# Altium PCB PCB2_third.PCBDOC (part 2 of 3)
Units mil, origin at the board's own origin, x right, y up, seen from the top; angles counter-clockwise.
Board outline 6000 x 4000 mil, 2 copper layers (Top Layer, Bottom Layer); 72 components, 143 nets, 481 pads, 207 vias.
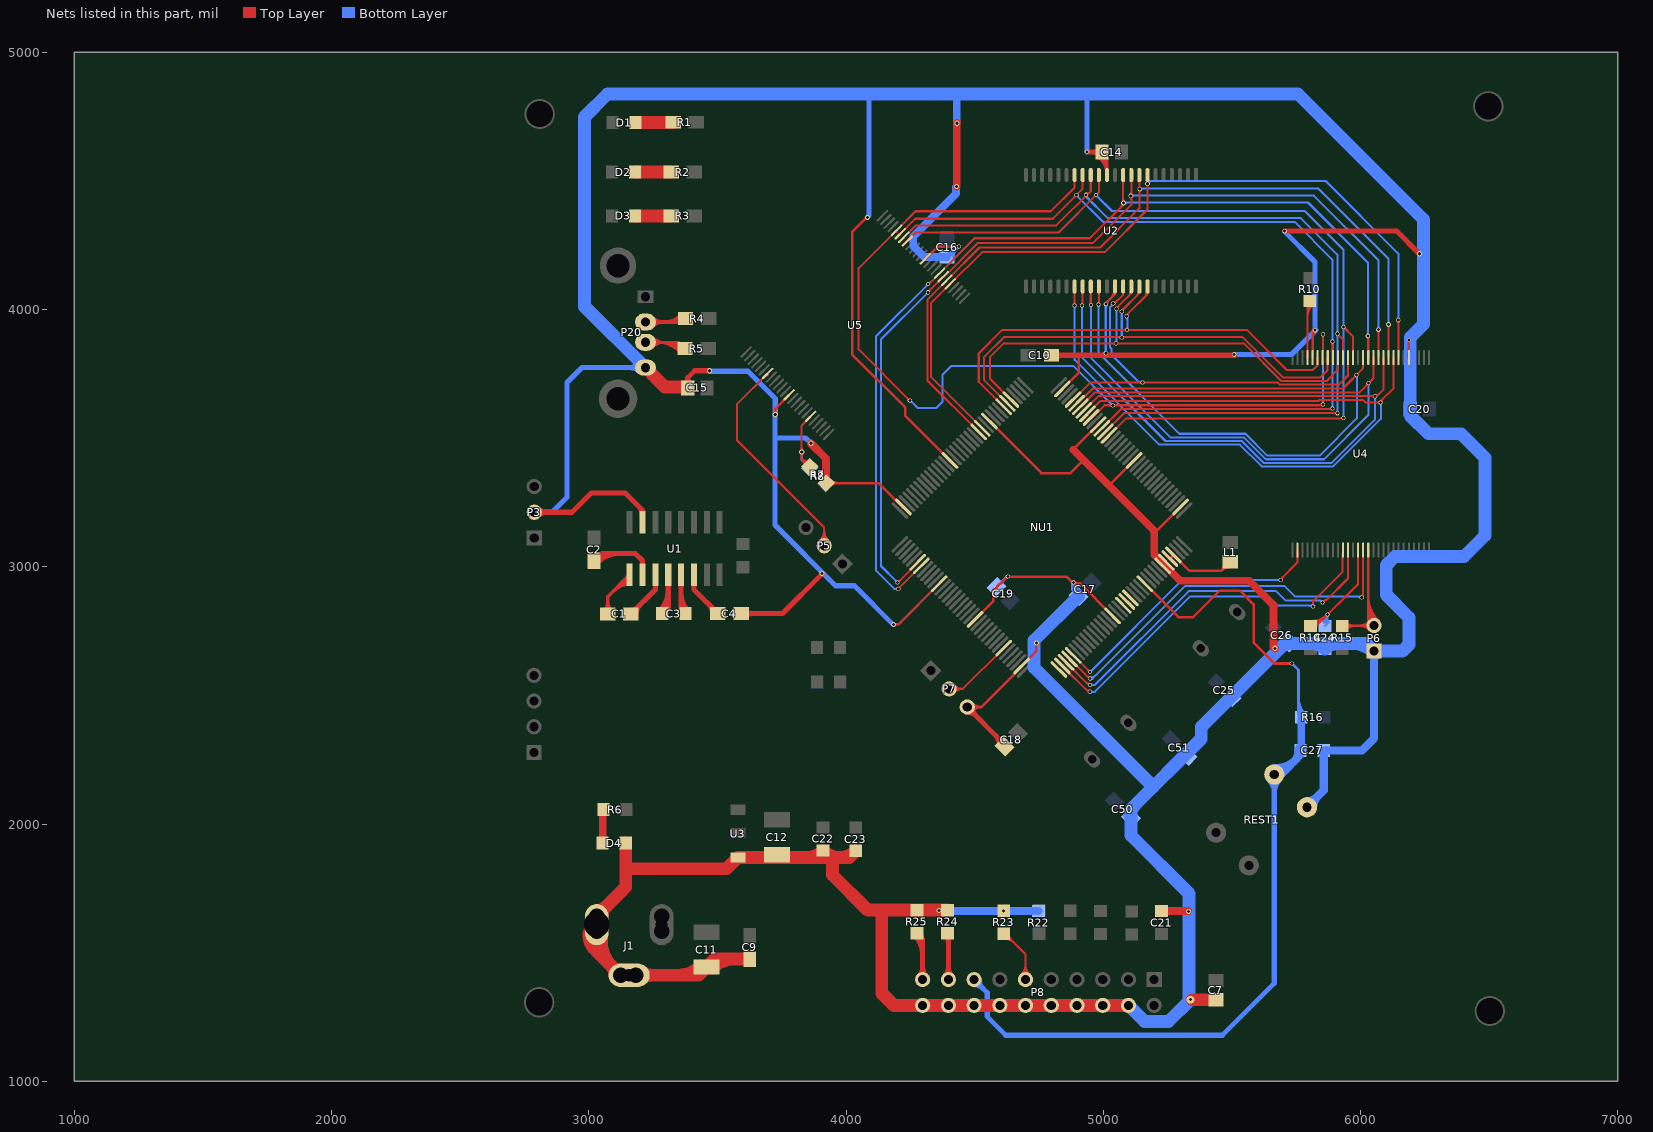
[diagram p2: the nets of this part, all layers, seen from the top]

## Via types
v1: diameter 16, hole 12, Top Layer to Bottom Layer, 141 vias
v2: diameter 18, hole 12, Top Layer to Bottom Layer, 34 vias
v3: diameter 20, hole 12, Top Layer to Bottom Layer, 29 vias
v4: diameter 30, hole 12, Top Layer to Bottom Layer, 2 vias
v5: diameter 30, hole 14, Top Layer to Bottom Layer, 1 vias

## Nets (pads, with @x,y where several pads share a name; then routed paths per layer and width w, separated by ;. In a path a pad name is that pad's centre, name@x,y a point inside that pad or via, vN(x,y) a via of type N, cw(c..) or ccw(c..) an arc to the next point about the centre after c; other vN are vias at no path point) (continued)
A19: NU1.2 U4.11 | length 1509
  Top Layer w8: NU1.2@4841.34,2614.32 4941.66,2514 v1(4948,2514) ; 4930.35,2525.31 ccw(c4948,2542.97) v1@4948,2518 ; v1@5812.17,2848.83 ccw(c5802.93,2858.07) 5816,2858.07 ; v1@5816,2846 5816,2866 5931,2981 U4.11@5931,3051
  Bottom Layer w8: v1(4948,2514) 4967,2514 5337,2884 5630,2884 5665,2849 5821,2849 v1(5815,2846) ; v1@4950.83,2511.17 cw(c4957.66,2504.34) 4957.66,2514 cw(c4957.66,2523.66) v1@4950.83,2516.83 ; 5798.1,2849 cw(c5798.1,2829.1) v1@5812.17,2843.17
A20: NU1.3 U4.12 | length 1507.9
  Top Layer w8: NU1.3@4855.26,2628.24 4942.5,2541 v1(4949,2541) ; 4931.07,2552.43 ccw(c4949,2570.35) v1@4949,2545 ; v1@5853,2865 ccw(c5853,2874.66) 5859.83,2867.83 ccw(c5866.66,2861) v1@5857,2861 ; v1@5854,2862 5862,2870 5867,2870 5951.53,2954.53 U4.12@5951.53,3065
  Bottom Layer w8: v1(4949,2541) 4968,2541 5332,2905 5672,2905 5707,2870 ; v1@4951.83,2538.17 cw(c4958.66,2531.34) 4958.66,2541 cw(c4958.66,2550.66) v1@4951.83,2543.83 ; 5708,2869 5844,2869 v1@5853,2860 ; 5844.5,2868.5 ccw(c5852.95,2876.95) v1@5852.99,2865
  other v1: 5853,2861
A21: NU1.4 U4.15 | length 1622.8
  Top Layer w8: NU1.4@4869.18,2642.16 v1@4945.34,2566 ; 4935.92,2575.42 ccw(c4949,2588.5) v1@4949,2570 ; v1@6002.17,2883.83 ccw(c5981.85,2904.15) 6010.59,2904.15 ; v1@6008,2881 6010.59,2883.59 U4.15@6010.59,3065
  Bottom Layer w8: v1@4949,2562 ccw(c4949,2576.49) 4959.24,2566.24 ; v1(4949,2566) 4959,2566 5319,2926 5704,2926 5746,2884 ; v1@4949,2570 ccw(c4949,2603.8) 4972.9,2579.9 ; v1@4951.83,2563.17 cw(c4958.66,2556.34) 4958.66,2566 cw(c4958.66,2575.66) v1@4951.83,2568.83 ; 5745,2884 6000,2884 v1@6004,2880 ; 5988.1,2884 cw(c5988.1,2864.1) v1@6002.17,2878.17
  other v1: 6005,2881
A22: NU1.5 U4.2 | length 1184.9
  Top Layer w8: NU1.5@4883.1,2656.08 v1@4951,2588.18 ; 4940.76,2598.41 ccw(c4949,2606.65) v1@4949,2595 ; 4942.75,2596.42 cw(c4937.33,2591) v1@4945,2591 ; v1@5690,2952 5754.69,3016.68 U4.2@5754.69,3065 ; v1@5694,2949 cw(c5710.9,2949) 5698.95,2960.95
  Bottom Layer w8: v1(4949,2591) 5307,2949 v1(5690,2949) v1@5691,2949 ; v1@4949,2595 ccw(c4949,2604.66) 4955.83,2597.83 ccw(c4962.66,2591) v1@4953,2591 ; v1@5687.17,2946.17 ccw(c5680.34,2939.34) 5680.34,2949 ccw(c5680.34,2958.66) v1@5687.17,2951.83
A23: NU1.1
BOOT0: NU1.138 P7.2 | length 409
  Top Layer w8: P7.2@4400.71,2525.29 4454.44,2525.29 ; P7.2@4414.3,2514.22 cw(c4437.6,2495.24) 4437.6,2525.29 cw(c4437.6,2555.34) P7.2@4414.3,2536.36 ; P7.2@4420.5,2509.17 cw(c4454.43,2481.52) 4454.43,2525.29 ; P7.2@4420.5,2541.41 ccw(c4454.43,2569.06) 4454.43,2525.29 ; NU1.138@4613.06,2683.92 4454.44,2525.29
D0: NU1.85 U2.7 U4.35 U5.29 | length 3303.7
  Top Layer w8: NU1.85@4529.55,3538.57 4330,3738.11 4330,4024.06 U5.29@4405.41,4099.47 4528.94,4223 5006,4223 5172.02,4389.02 U2.7@5172.02,4523 ; v2@5168.46,4485.46 cw(c5159.87,4476.87) 5172.02,4476.87 ; v2@5168.46,4492.54 ccw(c5159.87,4501.13) U2.7@5172.02,4501.13 ; U2.7@5169.28,4500.58 cw(c5162.67,4493.96) 5172.02,4493.96 cw(c5181.38,4493.96) U2.7@5174.76,4500.58 ; 5172.02,4476.99 cw(c5184.01,4476.99) v2@5175.54,4485.46 ; U2.7@5172.02,4501.01 ccw(c5184.01,4501.01) v2@5175.54,4492.54 ; v2@6143.46,3955.46 cw(c6131.59,3943.59) 6148.39,3943.59 ; U4.35@6148.39,3813.03 v2@6148.39,3959.61
  Bottom Layer w8: v2@5170,4486 5184,4500 5864,4500 6147,4217 v2(6147,3959) ; v2@5172,4494 ccw(c5172,4508.49) 5182.24,4498.24 ; v2@5177,4489 cw(c5186.66,4489) 5179.83,4495.83 ; v2@6143.46,3962.54 ccw(c6134.93,3971.07) 6147,3971.07 ccw(c6159.07,3971.07) v2@6150.54,3962.54
  other v2: 5172,4489
D1: NU1.86 U2.8 U4.37 U5.30 | length 3258.4
  Top Layer w8: NU1.86@4515.63,3524.65 4316,3724.27 4316,4037.9 U5.30@4391.49,4113.39 4519.1,4241 4988,4241 5140.53,4393.53 U2.8@5140.53,4523 ; U2.8@5137.79,4500.58 cw(c5131.17,4493.96) 5140.53,4493.96 cw(c5149.88,4493.96) U2.8@5143.27,4500.58 ; 5140.53,4452.37 cw(c5157.63,4452.37) v2@5145.54,4464.46 ; 5140.53,4483.63 ccw(c5157.63,4483.63) v2@5145.54,4471.54 ; v2@6105.46,3938.46 cw(c6096.89,3929.89) 6109.02,3929.89 ; U4.37@6109.02,3813.03 v2@6109.02,3940.99 ; 6109.01,3929.97 cw(c6121.03,3929.97) v2@6112.54,3938.46
  Bottom Layer w8: v2@5140,4467 5143,4470 5837,4470 6109,4198 v2(6109,3942) ; v2@5145.54,4464.46 cw(c5158.9,4451.1) 5158.9,4470 ; v2@6105.46,3945.54 ccw(c6096.93,3954.07) 6109,3954.07 ccw(c6121.07,3954.07) v2@6112.54,3945.54
  other v2: 5142,4468
D2: NU1.114 U2.9 U4.39 U5.31 | length 4016.2
  Top Layer w8: v1@4198,2938 4201,2938 4279,3016 NU1.114@4279,3017.98 ; v1@4200,2943 ccw(c4200,2957.49) 4210.24,2947.24 ; 4247.89,2984.89 ccw(c4241.25,2991.53) NU1.114@4250.64,2991.53 ; v1@4315,4065 4315.26,4065 U5.31@4377.57,4127.31 4381.31,4127.31 4513,4259 4961,4259 5109.03,4407.03 U2.9@5109.03,4523 ; v1@4323,4067 cw(c4336.86,4067) 4327.06,4076.8 ; U5.31@4395.38,4145.46 ccw(c4395.38,4155.28) 4402.33,4148.33 ; v2@5103.46,4438.46 cw(c5090.02,4425.02) 5109.03,4425.02 ; v2@5103.46,4445.54 ccw(c5090.02,4458.98) 5109.03,4458.98 ; U2.9@5106.29,4500.58 cw(c5099.68,4493.96) 5109.03,4493.96 cw(c5118.38,4493.96) U2.9@5111.77,4500.58 ; v2@6066.46,3918.46 cw(c6058.79,3910.79) 6069.65,3910.79 ; U4.39@6069.65,3813.03 v2@6069.65,3923.64 ; 6069.65,3909.07 cw(c6082.93,3909.07) v2@6073.54,3918.46
  Bottom Layer w8: v1@4196,2939 ccw(c4186.34,2939) 4193.17,2945.83 ccw(c4200,2952.66) v1@4200,2943 ; v1@4198,2937 4198,2941 4136,3003 4136,3884 v1(4319,4067) ; v1@4315,4067 cw(c4305.34,4067) 4312.17,4060.17 cw(c4319,4053.34) v1@4319,4063 ; v2@5106,4443 5819,4443 6070,4192 v2(6070,3922) ; v2@5110.54,4438.46 cw(c5121.49,4427.51) 5121.49,4443 ; v2@5110.54,4445.54 ccw(c5116.66,4451.66) 5116.66,4443 ; v2@6066.46,3925.54 ccw(c6057.93,3934.07) 6070,3934.07 ccw(c6082.07,3934.07) v2@6073.54,3925.54
  other v1: 4200,2939
  other v2: 5107,4442
D3: NU1.115 U2.10 U4.41 U5.32 | length 4014.2
  Top Layer w8: v1@4203,2918 ccw(c4203,2927.3) 4209.58,2920.72 ; v1@4203.85,2915 NU1.115@4292.92,3004.06 ; v1@4207,2914 cw(c4217.01,2914) 4209.93,2921.08 ; v1(4319,4099) 4321.42,4099 4499.42,4277 4948,4277 5077.53,4406.53 U2.10@5077.53,4523 ; v1@4319,4103 ccw(c4319,4118.5) 4329.96,4107.54 ; 5066.22,4395.22 ccw(c5047.44,4414) v2@5074,4414 ; U2.10@5074.8,4500.58 cw(c5068.18,4493.96) 5077.54,4493.96 cw(c5086.89,4493.96) U2.10@5080.27,4500.58 ; 5077.53,4429.61 ccw(c5094.61,4429.61) v2@5082.54,4417.54 ; v2@6025.46,3893.46 cw(c6013.85,3881.85) 6030.28,3881.85 ; U4.41@6030.27,3813.03 v2@6030.27,3896.28 ; 6030.28,3888.01 cw(c6037.99,3888.01) v2@6032.54,3893.46
  Bottom Layer w8: v1@4200.17,2911.17 ccw(c4193.34,2904.34) 4193.34,2914 ccw(c4193.34,2923.66) v1@4200.17,2916.83 ; v1(4203,2914) 4187,2914 4117,2984 4117,3897 v1(4319,4099) ; v1@4315,4099 cw(c4305.34,4099) 4312.17,4092.17 cw(c4319,4085.34) v1@4319,4095 ; v2@5082,4416 5796,4416 6029,4183 v2(6029,3897) ; v2@5082.54,4410.46 cw(c5095.9,4397.1) 5095.9,4416 ; v2@6025.46,3900.54 ccw(c6016.93,3909.07) 6029,3909.07 ccw(c6041.07,3909.07) v2@6032.54,3900.54
  other v2: 5079,4414
D4: NU1.58 U2.13 U4.44 U5.41 | length 3806.8
  Top Layer w8: U5.41@4238.37,4266.5 4272,4300.13 4827.87,4300.13 4983.05,4455.3 U2.13@4983.05,4523 ; 4964.65,4436.9 ccw(c4956.55,4445) v1@4968,4445 ; 4966.44,4438.7 cw(c4972,4433.14) v1@4972,4441 ; v1@4972,4449 ccw(c4972,4460.45) 4980.1,4452.35 ; v1@4976,4445 cw(c4983.86,4445) 4978.3,4450.56 ; U2.13@4980.31,4500.58 cw(c4973.69,4493.96) 4983.05,4493.96 cw(c4992.4,4493.96) U2.13@4985.79,4500.58 ; NU1.58@5022.29,3510.73 5023.73,3510.73 5090,3577 5933,3577 v1(5934,3578) ; NU1.58@5048.74,3539.08 ccw(c5048.74,3547.15) 5054.44,3541.44 ; 5921.93,3577 ccw(c5921.93,3590.07) v1@5931.17,3580.83 ; v1@5934,3928 cw(c5934,3918.34) 5940.83,3925.17 cw(c5947.66,3932) v1@5938,3932 ; v1(5934,3932) 5971.22,3894.78 U4.44@5971.22,3813.03
  Bottom Layer w8: v1@4972,4441 cw(c4972,4431.34) 4978.83,4438.17 cw(c4985.66,4445) v1@4976,4445 ; v1(4972,4445) 5034,4383 5784,4383 5934,4233 v1(5934,3932) v1(5934,3578) ; v1@5931.17,3580.83 ccw(c5924.34,3587.66) 5934,3587.66 ccw(c5943.66,3587.66) v1@5936.83,3580.83 ; v1@5931.17,3929.17 cw(c5924.34,3922.34) 5934,3922.34 cw(c5943.66,3922.34) v1@5936.83,3929.17 ; v1@5931.17,3934.83 ccw(c5924.34,3941.66) 5934,3941.66 ccw(c5943.66,3941.66) v1@5936.83,3934.83
D5: NU1.59 U2.14 U4.46 U5.42 | length 3736.1
  Top Layer w8: U5.42@4224.45,4280.42 4225.42,4280.42 4272,4327 4818,4327 4951.55,4460.55 U2.14@4951.55,4523 ; 4923.34,4432.34 ccw(c4909.69,4446) v1@4929,4446 ; v1@4933,4450 ccw(c4933,4469.31) 4946.66,4455.66 ; U2.14@4948.81,4500.58 cw(c4942.2,4493.96) 4951.55,4493.96 cw(c4960.9,4493.96) U2.14@4954.29,4500.58 ; NU1.59@5008.37,3524.65 5080.73,3597 v1(5910,3597) v1@5911,3597 ; v1@5907.17,3594.17 ccw(c5900.34,3587.34) 5900.34,3597 ccw(c5900.34,3606.66) v1@5907.17,3599.83 ; v1@5910,3902 cw(c5910,3892.34) 5916.83,3899.17 cw(c5923.66,3906) v1@5914,3906 ; v1(5910,3906) 5931.85,3884.15 U4.46@5931.85,3813.03
  Bottom Layer w8: v1(4933,4446) 4933,4439.4 5017.4,4355 5768,4355 5910,4213 v1(5910,3906) ; v1@4937,4446 ccw(c4962.59,4446) 4944.49,4427.91 ; v1@5907.17,3599.83 ccw(c5900.34,3606.66) 5910,3606.66 ccw(c5919.66,3606.66) v1@5912.83,3599.83 ; v1@5907.17,3903.17 cw(c5900.34,3896.34) 5910,3896.34 cw(c5919.66,3896.34) v1@5912.83,3903.17 ; v1@5907.17,3908.83 ccw(c5900.34,3915.66) 5910,3915.66 ccw(c5919.66,3915.66) v1@5912.83,3908.83 ; v1(5910,3597) v1(5910,3906) ; v1@5910,3909 v1(5910,3906)
D6: NU1.60 U2.15 U4.48 U5.43 | length 3624.2
  Top Layer w8: U5.43@4210.54,4294.34 4269.19,4353 4804,4353 4920.05,4469.05 U2.15@4920.05,4523 ; 4887.46,4436.46 ccw(c4878.93,4445) v1@4891,4445 ; v1@4895,4449 ccw(c4895,4461.07) 4903.54,4452.54 ; U2.15@4917.32,4500.58 cw(c4910.7,4493.96) 4920.05,4493.96 cw(c4929.41,4493.96) U2.15@4922.79,4500.58 ; NU1.60@4994.45,3538.57 5068.89,3613 5780.2,3613 5781.2,3614 5782.2,3613 5888,3613 v1(5891,3616) ; 5874.1,3613 ccw(c5874.1,3632.9) v1@5888.17,3618.83 ; v1@5888.17,3873.17 cw(c5877.77,3862.77) 5892.48,3862.77 ; U4.48@5892.48,3813.03 v1@5892.48,3874.52
  Bottom Layer w8: v1@4895,4441 cw(c4895,4431.34) 4901.83,4438.17 cw(c4908.66,4445) v1@4899,4445 ; v1(4895,4445) 4999,4341 5744,4341 5891,4194 v1(5891,3876) ; v1@5888.17,3618.83 ccw(c5881.34,3625.66) 5891,3625.66 ccw(c5900.66,3625.66) v1@5893.83,3618.83 ; v1@5888.17,3873.17 cw(c5881.34,3866.34) 5891,3866.34 cw(c5900.66,3866.34) v1@5893.83,3873.17 ; v1@5888.17,3878.83 ccw(c5881.34,3885.66) 5891,3885.66 ccw(c5900.66,3885.66) v1@5893.83,3878.83 ; v1(5891,3616) v1@5891,3874
D7: NU1.63 U2.16 U4.50 U5.44 | length 4056.5
  Top Layer w8: 4196.62,4300.69 U5.44@4196.62,4308.26 ; v1@4244,3646 ccw(c4234.34,3646) 4241.17,3652.83 ccw(c4248,3659.66) v1@4248,3650 ; v1(4248,3646) 4049,3845 4049,4160.64 U5.44@4196.62,4308.26 ; U2.16@4885.82,4500.58 cw(c4879.21,4493.96) 4888.56,4493.96 cw(c4897.91,4493.96) U2.16@4891.3,4500.58 ; U2.16@4888.56,4523 4888.56,4474.56 4796,4382 4270.36,4382 U5.44@4196.62,4308.26 ; NU1.63@4952.7,3580.33 4958.04,3580.33 5005.72,3628 v1@5854,3628 ; NU1.63@4979.14,3608.68 ccw(c4979.14,3626.18) 4991.52,3613.81 ; 5024.93,3628 cw(c5024.93,3614.93) v1@5034.17,3624.17 ; v1@5039.83,3624.17 cw(c5049.07,3614.93) 5049.07,3628 ; 5837.1,3628 ccw(c5837.1,3647.9) v1@5851.17,3633.83 ; v1@5851.17,3901.17 cw(c5844.34,3894.34) 5854,3894.34 cw(c5863.66,3894.34) v1@5856.83,3901.17 ; U4.50@5853.11,3813.03 5854,3813.92 v1(5854,3904)
  Bottom Layer w8: v1@4248,3642 cw(c4248,3625.1) 4259.95,3637.05 ; v1@4250,3647 4280,3617 4350,3617 4375,3642 4375,3746 4410,3781 4883,3781 v1(5037,3627) ; v1@5033,3627 ccw(c5023.34,3627) 5030.17,3633.83 ccw(c5037,3640.66) v1@5037,3631 ; v1@5851.17,3633.83 ccw(c5841.93,3643.07) 5855,3643.07 ; v1@5851.17,3901.17 cw(c5841.93,3891.93) 5855,3891.93 ; v1(5854,3631) 5855,3630 5855,3883 ; 5855,3888 5855,3883 ; v1@5856,3908 5855,3908 5855,3883
D8: NU1.64 U2.29 U4.36 | length 3233.1
  Top Layer w8: U2.29@4885.82,4067.5 cw(c4879.21,4060.89) 4888.56,4060.89 cw(c4897.91,4060.89) U2.29@4891.3,4067.5 ; v1@4886.17,4018.83 ccw(c4880.41,4024.59) 4888.56,4024.59 ; v1@4888.56,4017.56 U2.29@4888.56,4089.93 ; 4888.56,4026.72 ccw(c4899.72,4026.72) v1@4891.83,4018.83 ; NU1.64@4938.78,3594.25 4989.53,3645 ; 4990,3645 5825,3645 ; 5826,3645 5836,3645 5840,3649 6009,3649 6019,3639 v1@6076,3639 ; v1@6075.17,3636.17 ccw(c6068.34,3629.34) 6068.34,3639 ccw(c6068.34,3648.66) v1@6075.17,3641.83 ; v1@6079,3645 6128.7,3694.7 U4.36@6128.7,3813.03 ; v1@6082,3639 cw(c6103.73,3639) 6088.36,3654.36
  Bottom Layer w8: v1@4886.17,4013.17 cw(c4879.34,4006.34) 4889,4006.34 cw(c4898.66,4006.34) v1@4891.83,4013.17 ; v1(4889,4016) 4889,3804 5218,3475 5531,3475 5616,3390 5893.8,3390 6079,3575.2 6079,3647 ; v1@6075.17,3636.17 cw(c6065.93,3626.93) 6079,3626.93
  other v1: 6078,3639
D9: NU1.65 U2.30 U4.38 | length 3162.5
  Top Layer w8: v1@4915.17,4017.83 ccw(c4903.38,4029.62) 4920.05,4029.62 ; U2.30@4917.32,4067.5 cw(c4910.7,4060.89) 4920.05,4060.89 cw(c4929.41,4060.89) U2.30@4922.79,4067.5 ; v1@4920.05,4014.95 U2.30@4920.05,4089.93 ; NU1.65@4924.86,3608.17 4926.17,3608.17 4981,3663 6064,3663 6089.33,3688.33 U4.38@6089.33,3813.03 ; NU1.65@4951.3,3636.52 ccw(c4951.3,3644.28) 4956.79,3638.79 ; v1@6054.17,3660.17 ccw(c6047.34,3653.34) 6047.34,3663 ccw(c6047.34,3672.66) v1@6054.17,3665.83 ; v1@6057,3667 ccw(c6057,3693.56) 6075.78,3674.78
  Bottom Layer w8: v1@4915.17,4012.17 cw(c4908.34,4005.34) 4918,4005.34 cw(c4927.66,4005.34) v1@4920.83,4012.17 ; v1(4918,4015) 4918,3813 5242,3489 5538,3489 5623,3404 5888,3404 6056,3572 6056,3660 v1@6058,3662 ; 6056,3650.93 cw(c6069.07,3650.93) v1@6059.83,3660.17
  other v1: 6057,3663
D10: NU1.66 U2.31 U4.40 | length 3059.7
  Top Layer w8: NU1.66@4910.94,3622.08 4965.85,3677 5995,3677 6049.96,3731.96 U4.40@6049.96,3813.03 ; U2.31@4948.81,4067.5 cw(c4942.2,4060.89) 4951.55,4060.89 cw(c4960.9,4060.89) U2.31@4954.29,4067.5 ; v1@4949.17,4020.83 ccw(c4943.43,4026.57) 4951.55,4026.57 ; v1@4951.55,4018.45 U2.31@4951.55,4089.93 ; 4951.55,4028.74 ccw(c4962.74,4028.74) v1@4954.83,4020.83 ; 6023.46,3705.46 ccw(c6014.93,3714) v1@6027,3714 ; v1@6031,3718 ccw(c6031,3730.07) 6039.54,3721.54
  Bottom Layer w8: v1@4949.17,4015.17 cw(c4942.34,4008.34) 4952,4008.34 cw(c4961.66,4008.34) v1@4954.83,4015.17 ; v1(4952,4018) 4952,3812 5261,3503 5547,3503 5632,3418 5859,3418 6031,3590 v1(6031,3714) ; v1@6028.17,3711.17 cw(c6021.34,3704.34) 6031,3704.34 cw(c6040.66,3704.34) v1@6033.83,3711.17
D11: NU1.67 U2.32 U4.42 | length 2965.8
  Top Layer w8: NU1.67@4897.02,3636 4902.36,3636 4959.36,3693 5932,3693 6010.59,3771.59 U4.42@6010.59,3813.03 ; NU1.67@4923.47,3664.36 ccw(c4923.47,3681.86) 4935.84,3669.48 ; v1@4979.17,4021.83 ccw(c4969.82,4031.18) 4983.05,4031.18 ; U2.32@4980.31,4067.5 cw(c4973.69,4060.89) 4983.05,4060.89 cw(c4992.4,4060.89) U2.32@4985.79,4067.5 ; v1@4983.05,4017.95 U2.32@4983.05,4089.93 ; v1@5980,3745 cw(c5970.34,3745) 5977.17,3738.17 cw(c5984,3731.34) v1@5984,3741 ; v1@5984,3749 ccw(c5984,3758.66) 5990.83,3751.83 ccw(c5997.66,3745) v1@5988,3745
  Bottom Layer w8: v1@4979.17,4016.17 cw(c4972.34,4009.34) 4982,4009.34 cw(c4991.66,4009.34) v1@4984.83,4016.17 ; v1(4982,4019) 4982,3831 5296,3517 5553,3517 5638,3432 5841,3432 5986,3577 v1@5986,3745 ; v1@5981.17,3742.17 cw(c5969.51,3730.51) 5986,3730.51
  other v1: 5984,3745
D12: NU1.68 U2.35 U4.45 | length 1753.4
  Top Layer w8: NU1.68@4883.1,3649.92 4949.18,3716 5678.4,3716 5686.4,3708 5916,3708 5951.53,3743.53 U4.45@5951.53,3813.03 ; v1@5036.5,4016.5 5077.54,4057.54 U2.35@5077.54,4089.93 5077.54,4061.54 ; v1@5039,4028 ccw(c5039,4049.73) 5054.36,4034.36 ; U2.35@5074.8,4067.5 cw(c5068.18,4060.89) 5077.54,4060.89 cw(c5086.89,4060.89) U2.35@5080.27,4067.5 ; U2.35@5074.94,4067.37 cw(c5069.68,4061.54) 5077.54,4061.54 ; U2.35@5080.13,4067.37 ccw(c5085.39,4061.54) 5077.54,4061.54 ; 5139.93,3716 ccw(c5139.93,3729.07) v1@5149.17,3719.83 ; v1@5154.83,3719.83 ccw(c5164.07,3729.07) 5164.07,3716
  Bottom Layer w8: 5030.76,4013.76 ccw(c5020.51,4024) v1@5035,4024 ; 5033,3824 5032,3825 5032,3848 5027,3853 5027,4010 v1@5037,4020 ; 5034,3823 5139,3718 v1@5152,3718 ; 5139.93,3718 cw(c5139.93,3704.93) v1@5149.17,3714.17
  other v1: 5152,3717 5039,4024
D13: NU1.77 U2.36 U4.47 | length 2034.1
  Top Layer w8: 4615,3870 4613.5,3868.5 ; NU1.77@4640.9,3649.92 4559,3731.82 4559,3814 4613.5,3868.5 ; 5038.14,3868.5 ccw(c5038.14,3879.86) v1@5046.17,3871.83 ; 5040.55,3868.5 cw(c5040.55,3860.55) v1@5046.17,3866.17 ; v1@5051,4005 5109.03,4063.03 U2.36@5109.03,4089.93 ; v1@5051.83,3866.17 cw(c5057.45,3860.55) 5057.45,3868.5 ; v1@5051.83,3871.83 ccw(c5059.86,3879.86) 5059.86,3868.5 ; v1@5055,4003 cw(c5069.49,4003) 5059.24,4013.24 ; 5097.32,4051.32 ccw(c5078.39,4070.24) U2.36@5105.16,4070.24 ; U4.47@5912.16,3813.03 5912.16,3765.16 5869,3722 5692.2,3722 5545.7,3868.5 4613.5,3868.5
  Bottom Layer w8: v1@5046.17,3871.83 ccw(c5034.51,3883.49) 5051,3883.49 ; v1@5048.17,4000.17 cw(c5041.34,3993.34) 5051,3993.34 cw(c5060.66,3993.34) v1@5053.83,4000.17 ; v1@5051,3871 v1(5051,4003)
  other v1: 5049,3869
D14: NU1.78 U2.37 U4.49 | length 2045.9
  Top Layer w8: NU1.78@4626.98,3636 4536,3727 4536,3814 4616,3894 5540,3894 5698,3736 5741,3736 ; 5055.1,3894 cw(c5055.1,3874.1) v1@5069.17,3888.17 ; v1(5072,3992) v1@5075,3998 ; v1@5072,3995 v1@5075,3998 ; v1@5074.83,3888.17 cw(c5088.9,3874.1) 5088.9,3894 ; v1@5076,3992 cw(c5092.9,3992) 5080.95,4003.95 ; 5129.16,4052.16 ccw(c5111.08,4070.24) U2.37@5136.65,4070.24 ; U2.37@5140.53,4089.93 5140.53,4063.53 v1@5075,3998 ; 5737,3736 5741,3736 ; 5871,3783.26 cw(c5876.98,3783.26) U4.49@5872.75,3787.49 ; U4.49@5872.8,3813.03 5871,3811.24 5871,3763 5844,3736 5741,3736
  Bottom Layer w8: v1@5069.17,3893.83 ccw(c5062.34,3900.66) 5072,3900.66 ccw(c5081.66,3900.66) v1@5074.83,3893.83 ; v1@5069.17,3989.17 cw(c5062.34,3982.34) 5072,3982.34 cw(c5081.66,3982.34) v1@5074.83,3989.17 ; v1(5072,3891) v1(5072,3992)
D15: NU1.79 U2.38 U4.51 | length 2072.8
  Top Layer w8: NU1.79@4613.06,3622.08 4516,3719.15 4516,3829 4608,3921 5558,3921 5714,3765 5815,3765 5833.43,3783.43 U4.51@5833.43,3813.03 ; v1@5088.65,3977.24 ccw(c5083.8,3983.91) 5092,3983 ; v1@5089.17,3918.17 ccw(c5082.34,3911.34) 5082.34,3921 ccw(c5082.34,3930.66) v1@5089.17,3923.83 ; v1(5091,3974) 5092,3983 ; v1@5094,3976.64 cw(c5100.2,3982.09) 5092,3983 ; v1@5094.65,3975.64 cw(c5100.66,3978.34) 5096,3983 ; v1@5094.83,3918.17 cw(c5101.66,3911.34) 5101.66,3921 cw(c5101.66,3930.66) v1@5094.83,3923.83 ; v1@5095,3974 cw(c5114.31,3974) 5100.66,3987.66 ; 5157.48,4044.48 ccw(c5131.71,4070.24) U2.38@5168.15,4070.24 ; U2.38@5169.28,4067.5 cw(c5162.67,4060.89) 5172.02,4060.89 cw(c5181.38,4060.89) U2.38@5174.76,4067.5 ; 5171.13,4058.13 ccw(c5159.02,4070.24) U2.38@5176.15,4070.24 ; U2.38@5172.02,4089.93 5172.02,4059.02 5096,3983 ; 5830.69,3780.69 ccw(c5823.94,3787.44) U4.51@5833.49,3787.44 ; 5092,3983 5096,3983
  Bottom Layer w8: v1@5088.17,3971.17 cw(c5074.1,3957.1) 5094,3957.1 ; v1@5089.17,3923.83 ccw(c5077.51,3935.49) 5094,3935.49 ; v1@5092,3975 5094,3973 v1@5094,3919
  other v1: 5092,3921
GND: C4.2 C7.1 C9.2 C10.2 C11.2 C12.2 C14.1 C15.1 C16.1 C17.1 C18.1 C19.1 C20.1 C21.2 C22.2 C23.2 C24.2 C25.1 C26.1 C27.1 C50.1 C51.1 D4.2 J1.2 J1.3 NU1.16 NU1.30 NU1.31 NU1.38 NU1.51 NU1.61 NU1.71 NU1.83 NU1.94 NU1.107 NU1.120 NU1.130 NU1.143 P3.2 P6.1 P7.3 P8.4 P8.6 P8.8 P8.10 P8.12 P8.14 P8.16 P8.18 P8.20 P20.4 R7.2 R22.2 R23.2 R24.2 R25.2 REST1.1 U1.15 U2.12 U2.34 U3.1 U4.33 U4.52 U5.13 U5.36 | length 32896.5
  Top Layer w10: U1.15@3204.48,3209.95 ccw(c3195.58,3220) 3209,3220 ; U1.15@3209,3173.36 3209,3220 ; U1.15@3213.52,3209.95 cw(c3222.42,3220) 3209,3220 ; v3@3721.46,3595.54 ccw(c3712.93,3604.07) 3725,3604.07 ccw(c3737.07,3604.07) v3@3728.54,3595.54 ; v3(3725,3592) 3725,3613.93 U5.13@3779.03,3667.97 ; R7.2@3922.64,3325.36 4126.37,3325.36 4219.39,3232.34 NU1.107@4223.32,3232.34 ; R7.2@3936.78,3313.08 cw(c3966.43,3283.43) 3966.43,3325.36 ; R7.2@3936.78,3339.5 ccw(c3970.92,3373.64) 3970.92,3325.36 ; 4071.05,4348.05 cw(c4083,4336.1) v3@4083,4353 ; v3@4084,4361 4024,4301 4024,3826 4231,3619 4231,3586.56 NU1.94@4404.27,3413.29 ; v3@4182,2776 4204.05,2776 NU1.120@4362.51,2934.47 ; v3@4187.54,2771.46 cw(c4198.49,2760.51) 4198.49,2776 ; 4188.62,3263.11 ccw(c4196.87,3271.37) NU1.107@4196.87,3259.69 ; U5.36@4307.97,4196.91 4309.91,4196.91 4358,4245 v1(4440,4245) ; P7.3@4471.42,2454.58 4526.58,2454.58 ; P7.3@4482.21,2444.85 cw(c4504.09,2425.11) 4504.09,2454.58 cw(c4504.09,2484.04) P7.3@4482.21,2464.31 ; P7.3@4489.63,2438.15 cw(c4526.58,2404.83) 4526.58,2454.58 ; P7.3@4489.63,2471.01 ccw(c4526.58,2504.33) 4526.58,2454.58 ; NU1.130@4501.71,2795.27 4572,2865.56 4572,2905 v1(4629,2962) ; NU1.83@4557.38,3566.41 4759.79,3364 4872,3364 4912,3404 ; v1@4626,2962 4857,2962 4883,2936 4909.4,2936 NU1.16@5036.21,2809.19 ; 4652.08,2580.08 ccw(c4644.29,2587.87) NU1.143@4655.31,2587.87 ; 4740,2689.51 cw(c4755.49,2689.51) v3@4744.54,2700.46 ; v3@4740,2708 4740,2671.66 NU1.143@4682.66,2614.32 4682.66,2610.66 4526.58,2454.58 ; NU1.71@4841.34,3691.68 4842.68,3691.68 4842.68,3693.68 4905,3756 4905,3819 4908,3822 ; 4871.34,2947.66 ccw(c4885,2961.31) v1@4885,2942 ; 4883.05,3455 NU1.61@4980.53,3552.49 ; v1@4887.12,2941.12 ccw(c4899.49,2953.49) 4899.49,2936 ; C14.1@4982.04,4592.57 cw(c4919.33,4520.92) U2.12@5014.54,4520.92 ; C14.1@4988.62,4600.09 cw(c4938.62,4542.96) U2.12@5014.54,4542.96 ; C14.1@4995.21,4607.62 cw(c4957.91,4565) 5014.54,4565 ; C14.1@5001.8,4615.14 cw(c4977.2,4587.05) C14.1@5014.54,4587.05 ; v2@5010,4025 5046.04,4061.04 U2.34@5046.04,4089.93 ; v2@5014,4021 cw(c5033.31,4021) 5019.66,4034.66 ; U2.12@5014.54,4523 C14.1@5014.54,4593.06 ; 5022.24,3315.81 NU1.51@5119.73,3413.29 ; 5034.62,4049.62 ccw(c5014,4070.24) U2.34@5043.16,4070.24 ; NU1.31@5220.49,3042.49 5207,3055.99 5207,3138.66 NU1.38@5300.68,3232.34 ; U4.52@5813.74,3813.03 5813.74,3910.74 v2(5823,3920) ; 5813.74,3887.99 cw(c5855.01,3887.99) v2@5825.83,3917.17 ; 5813.74,3912.13 cw(c5830.87,3912.13) v2@5818.76,3924.24 ; v2@5819,3920 cw(c5809.34,3920) 5816.17,3913.17 cw(c5823,3906.34) v2@5823,3916 ; U4.33@6187.76,3813.03 6187.76,3881.76 v1(6188,3882)
  Top Layer w20: P3.2@2788,3212 2935,3212 3010,3287 3142,3287 3209,3220 ; P3.2@2801.81,3198.19 cw(c2835.14,3164.86) 2835.14,3212 cw(c2835.14,3259.14) P3.2@2801.81,3225.81 ; 3195.2,3233.8 cw(c3166.26,3204.86) U1.15@3207.19,3204.86 ; C15.1@3374.01,3710.38 ccw(c3351.61,3734.6) 3384.6,3734.6 ; C15.1@3384.6,3695 3384.6,3734.6 ; C15.1@3395.19,3710.38 cw(c3417.59,3734.6) 3384.6,3734.6 ; v3(3470,3762) 3412,3762 3384.6,3734.6 ; C4.2@3592,2818 3753,2818 v3@3906,2971 ; C4.2@3607.61,2807.39 cw(c3633.21,2781.79) 3633.21,2818 cw(c3633.21,2854.21) C4.2@3607.61,2828.61 ; P7.3@4471.42,2435.05 cw(c4471.42,2387.91) 4504.76,2421.24 cw(c4538.09,2454.58) P7.3@4490.95,2454.58 ; P7.3@4471.42,2454.58 4615.55,2310.45 C18.1@4615.55,2301.55 ; 4579.87,2346.13 cw(c4538.07,2304.34) C18.1@4597.18,2304.34 ; C10.2@4799,3822 v2@5512,3822 ; C10.2@4814.61,3811.39 cw(c4840.21,3785.79) 4840.21,3822 cw(c4840.21,3858.21) C10.2@4814.61,3832.61 ; v2@4940,4612 C14.1@4995.6,4612 ; C14.1@4984.57,4600.98 ccw(c4957.96,4574.36) 4957.96,4612 ccw(c4957.96,4649.64) C14.1@4984.57,4623.02 ; 4993.1,3822 ccw(c4993.1,3846.9) v2@5010.71,3829.29 ; v2@5009.29,3829.29 ccw(c5026.9,3846.9) 5026.9,3822 ; v2(5705,4305) 6141,4305 v3@6228,4218
  Top Layer w30: v3@3864,3479 3922.64,3420.36 R7.2@3922.64,3325.36 ; v3(4430,4478) 4430,4723 v3@4432,4725 ; 4883.05,3455 5198,3140.05 5198,3047.36 5231.08,3014.27 5236.19,3009.17 5299.36,2946 5567,2946 5662,2851 5662,2688 v3@5669,2681 ; C21.2@5227,1662 v3@5330,1662
  Top Layer w50: J1.3@3002.57,1580.73 ccw(c3076.01,1565.94) 3023.04,1512.96 ; J1.3@3031,1583 3031,1505 J1.2@3124,1412 3426,1412 3489,1475 C9.2@3626,1475 ; J1.3@3031,1642 3144,1755 D4.2@3144,1926 ; J1.3@3031,1664 ccw(c3031,1717.11) 3068.56,1679.56 ; J1.3@3051.59,1570.85 ccw(c3185.81,1543.82) 3089,1447 ; J1.3@3052,1643 cw(c3100.28,1643) 3066.14,1677.14 ; 3086.44,1449.56 cw(c3048.89,1412) J1.2@3102,1412 ; 3088.86,1447.14 ccw(c3123,1481.28) J1.2@3123,1433 ; 3144,1826 3535.28,1826 U3.1@3579.68,1870.4 4012.4,1870.4 C23.2@4038,1896 ; J1.2@3205.85,1397.15 cw(c3241.7,1361.3) 3241.7,1412 cw(c3241.7,1462.7) J1.2@3205.85,1426.85 ; P20.4@3220.42,3774.2 3295.62,3699 C15.1@3380.6,3699 ; P20.4@3235.91,3774.2 ccw(c3273.32,3774.2) 3246.87,3747.75 ; 3348.67,1412 ccw(c3348.67,1533.33) C11.2@3434.46,1447.54 ; C11.2@3481.54,1440.46 cw(c3564.91,1357.09) 3564.91,1475 ; 3674.34,1870.4 ccw(c3674.34,1918.66) C12.2@3708.46,1884.54 ; C12.2@3755.54,1884.54 ccw(c3789.66,1918.66) 3789.66,1870.4 ; 3848.65,1870.4 ccw(c3848.65,1958.04) C22.2@3910.61,1896.07 ; C22.2@3911.39,1896.07 ccw(c3973.35,1958.04) 3973.35,1870.4 ; 3948,1845 3948,1802 4085,1665 R24.2@4395,1665 ; 3978.06,1870.4 ccw(c3978.06,1954.62) C23.2@4037.61,1895.07 ; 4139,1665 4139,1342 4186,1295 P8.4@5098,1295 ; v4@5346.4,1316.6 C7.1@5438,1316.6 ; 3031,1524.3 ccw(c2980.3,1524.3) 3016.15,1560.15 cw(c2980.3,1524.3) 3031,1524.3 ; 3031,1524.3 cw(c3081.7,1524.3) 3045.85,1560.15 ccw(c3081.7,1524.3) 3031,1524.3
  Bottom Layer w10: C16.1@4393,4204.6 4399.6,4204.6 v1(4440,4245) ; C16.1@4396.94,4215.19 ccw(c4396.94,4247.18) C16.1@4419.56,4224.56 ; C16.1@4396.94,4225.19 ccw(c4396.94,4281.32) v1@4436.63,4241.63 ; C16.1@4417.53,4204.6 cw(c4460.81,4204.6) 4430.21,4235.21 ; C19.1@4585.55,2921.45 4626.11,2962 v1(4629,2962) ; 4618.94,2954.83 cw(c4629,2944.77) v1@4629,2959 ; v2@5007.17,3832.83 ccw(c5000.34,3839.66) 5010,3839.66 ccw(c5019.66,3839.66) v2@5012.83,3832.83 ; v2@5007.17,4018.17 cw(c5000.34,4011.34) 5010,4011.34 cw(c5019.66,4011.34) v2@5012.83,4018.17 ; v2(5010,3830) v2(5010,4021) ; C20.1@6179.04,3631.5 ccw(c6159.82,3650.72) 6187,3650.72 ; 6187,3658.43 ccw(c6235.1,3658.43) C20.1@6201.09,3624.43 ; 6187,3682.58 ccw(c6259.24,3682.58) C20.1@6208.16,3631.5 ; 6187,3872.34 cw(c6197.66,3872.34) v1@6190.12,3879.88 ; v1@6187,3881 6187,3619.6 C20.1@6193.6,3613
  Bottom Layer w20: P3.2@2788,3212 2857,3212 2915,3270 2915,3716 2973.2,3774.2 P20.4@3220.42,3774.2 ; P3.2@2801.81,3198.19 cw(c2835.14,3164.86) 2835.14,3212 cw(c2835.14,3259.14) P3.2@2801.81,3225.81 ; P20.4@3196.22,3759 ccw(c3159.52,3722.31) 3159.52,3774.2 ccw(c3159.52,3826.1) P20.4@3196.22,3789.4 ; v3@3469,3760 3619,3760 3725,3654 v3(3725,3592) ; 3724,3501 3843,3501 v3(3864,3480) ; v3@3724,3589 3724,3162 3959.69,2926.31 4032.69,2926.31 v3(4184,2775) ; 4090,4374.9 cw(c4066.1,4374.9) v3(4083,4358) 4090,4365 4090,4838 ; C17.1@4891,2906.78 4885,2912.78 v1(4885,2939) ccw(c4926.01,2939) C17.1@4907.72,2902.29 ; 4928,4838 4937,4829 v2(4937,4613) ; v2(5509,3825) 5732,3825 v2@5827,3920 ; v2@5704,4304 5823,4185 v2(5823,3920)
  Bottom Layer w30: v3@4369,1664 4371,1662 v3(4612,1662) ; C16.1@4393,4204.6 4303.4,4204.6 4261,4247 4261,4284 4428,4451 v3@4428,4476 ; v3(4431,4724) 4431,4831 ; v3@4615,1662 R22.2@4749,1662
  Bottom Layer w32: REST1.1@5792.27,2065.27 5857,2130 C27.1@5857,2286 6006,2286 6053,2333 P6.1@6053,2672 ; REST1.1@5792.27,2088.64 ccw(c5792.27,2145.06) 5832.17,2105.17 ccw(c5872.06,2065.27) REST1.1@5815.64,2065.27 ; P6.1@6043.43,2662.43 cw(c6020.34,2639.34) 6053,2639.34 cw(c6085.66,2639.34) P6.1@6062.57,2662.43
  Bottom Layer w50: 3193.96,3800.66 cw(c3167.51,3774.2) P20.4@3204.92,3774.2 ; P20.4@3220.42,3774.2 2984,4010.62 2984,4749 3073,4838 5757,4838 6245,4350 6245,3943 6193.6,3891.6 6193.6,3587.4 6264,3517 6391,3517 6484,3424 6484,3122 6402,3040 6134,3040 6100,3006 6100,2891 6188,2803 6188,2697 6163,2672 P6.1@6053,2672 6024,2701 C26.1@5725,2701 ; C17.1@4903.55,2885.55 4731,2713 4731,2608 5194.5,2144.5 ; P8.4@5098,1295 5161,1232 5254,1232 5334,1312 5334,1729 5108,1955 5108,2058 5381,2331 5381,2377 C26.1@5718,2714 ; C50.1@5104.46,2028.54 cw(c5167.06,2028.54) 5122.8,2072.8 ; 5692.17,2688.17 cw(c5724.07,2656.28) C26.1@5724.07,2701.39 ; 5813.16,2701 cw(c5813.16,2632.48) C24.2@5861.61,2680.93 ; C24.2@5862.39,2680.93 cw(c5910.84,2632.48) 5910.84,2701 ; 5972.06,2701 cw(c5972.06,2591.06) P6.1@6049.8,2668.8 ; C20.1@6194.19,3609.06 ccw(c6247.91,3609.06) 6209.92,3571.08
  other v3: 5332,1660 4361,1664 5668,2683 4741,2704 3907,2974 6230,4217
  other v4: 5339,1317
LED0: NU1.19
LED1: NU1.20
LED2: NU1.21
NetC1_1: C1.1 U1.1 | length 371.6
  Top Layer w15: C1.1@3061.63,2829.37 ccw(c3031.75,2859.25) 3074,2859.25 ccw(c3116.25,2859.25) C1.1@3086.37,2829.37 ; C1.1@3074,2817 3074,2883.64 U1.1@3159,2968.64 ; 3097.87,2907.51 cw(c3159,2846.39) U1.1@3159,2932.83 ; 3123.48,2933.12 cw(c3159,2897.6) U1.1@3159,2947.83 ; U1.1@3149.09,2958.72 cw(c3159,2948.81) U1.1@3159,2962.83
NetC1_2: C1.2 U1.3 | length 247.9
  Top Layer w20: C1.2@3164,2817 3259,2912 U1.3@3259,2968.64 ; C1.2@3169,2832 ccw(c3169,2856.14) C1.2@3186.07,2839.07 ; C1.2@3184,2817 cw(c3232.28,2817) 3198.14,2851.14
NetC2_2: C2.2 U1.2 | length 478
  Top Layer w20: C2.2@3017.46,3029.54 cw(c3071.7,2975.3) 3071.7,3052 ; C2.2@3021,3021 3052,3052 ; C2.2@3022.15,3040.96 ccw(c3025.07,3078.93) 3052,3052 ; C2.2@3031.61,3015.39 cw(c3119.98,2927.02) 3119.98,3052 ; C2.2@3036,3026 cw(c3060.14,3026) C2.2@3043.07,3043.07 ; U1.2@3209,2968.64 3209,3024 3181,3052 3052,3052
NetC3_1: C3.1 U1.5 | length 238.8
  Top Layer w20: C3.1@3359,2835 U1.5@3359,2968.64 ; 3359,2845.11 ccw(c3401.8,2845.11) C3.1@3371.53,2814.85 ; 3359,2893.4 ccw(c3450.08,2893.4) C3.1@3385.68,2828.99
NetC3_2: C3.2 U1.4 | length 265
  Top Layer w20: C3.2@3276.32,2828.99 ccw(c3197.43,2907.88) 3309,2907.88 ; C3.2@3290.47,2814.85 ccw(c3245.72,2859.6) 3309,2859.6 ; C3.2@3309,2841 U1.4@3309,2968.64
NetC4_1: C4.1 U1.6 | length 246
  Top Layer w20: U1.6@3409,2968.64 3409,2911 C4.1@3502,2818 ; 3467.86,2852.14 cw(c3433.72,2818) C4.1@3482,2818 ; C4.1@3479.93,2840.07 ccw(c3497,2857.14) C4.1@3497,2833
NetC24_1: C24.1 R14.2 U4.14 | length 758.1
  Top Layer w8: R14.2@5806,2770 5828,2770 5990.9,2932.91 U4.14@5990.9,3065 ; R14.2@5807.31,2765.68 ccw(c5807.31,2805.21) 5835.26,2777.26 ; R14.2@5807.31,2773.68 ccw(c5807.31,2832.52) 5848.92,2790.92 ; R14.2@5807.31,2781.68 ccw(c5807.31,2859.83) 5862.57,2804.57 ; R14.2@5807.31,2789.68 ccw(c5807.31,2887.15) v1@5876.23,2818.23 ; 5864.46,2806.46 ccw(c5855.93,2815) v1@5868,2815 ; v1@5872,2819 ccw(c5872,2831.07) 5880.54,2822.54
  Bottom Layer w8: C24.1@5854.83,2787.76 ccw(c5841.81,2815) v1(5872,2815) 5872,2780 C24.1@5862,2770 ; C24.1@5858.28,2780.54 ccw(c5847.88,2802.31) 5872,2802.31 ; v1@5869.17,2812.17 cw(c5862.34,2805.34) 5872,2805.34 cw(c5881.66,2805.34) v1@5874.83,2812.17 ; 5872,2796.56 ccw(c5889.87,2796.56) C24.1@5877.23,2783.92
NetD1_2: D1.2 R1.2 | length 145
  Top Layer w50: D1.2@3182,4727 R1.2@3327,4727
NetD2_2: D2.2 R2.2 | length 140
  Top Layer w50: D2.2@3180,4534 R2.2@3320,4534
NetD3_2: D3.2 R3.2 | length 140
  Top Layer w50: D3.2@3180,4364 R3.2@3320,4364
NetD4_1: D4.1 R6.1 | length 155.8
  Top Layer w30: D4.1@3054,1926 3054,2053 R6.1@3057,2056 ; 3054,2026.47 cw(c3085.21,2026.47) R6.1@3063.14,2048.54
NetL1_1: L1.1 NU1.32 NU1.33 | length 342.9
  Top Layer w10: NU1.32@5258.92,3031.9 NU1.33@5272.84,3045.82 5333.66,2985 5459.4,2985 L1.1@5494,3019.6 ; 5461.37,2986.97 ccw(c5439.23,3009.11) L1.1@5469.9,3015.44 ; 5461.63,2987.23 cw(c5490.06,2958.8) L1.1@5490.06,2999.01
NetP5_2: P5.2 U5.7 | length 1030
  Top Layer w8: 3695.52,3743.91 U5.7@3695.52,3751.48 3695.2,3751.48 3577,3633.28 3577,3491 3915.29,3152.71 P5.2@3915.29,3081.71 ; P5.2@3897.24,3099.76 ccw(c3853.66,3143.34) 3915.29,3143.34 ccw(c3976.92,3143.34) P5.2@3933.34,3099.76 ; P5.2@3902.9,3094.1 ccw(c3872.97,3124.03) 3915.29,3124.03 ccw(c3957.6,3124.03) P5.2@3927.68,3094.1
NetP6_2: P6.2 R15.2 U4.16 | length 959.4
  Top Layer w10: R15.2@5929,2770 P6.2@6051,2770 ; R15.2@5943.53,2756.79 cw(c5975.42,2724.89) 5975.42,2770 cw(c5975.42,2815.11) R15.2@5943.53,2783.21 ; 5988.96,2770 ccw(c5988.96,2836.04) P6.2@6035.66,2789.34 ; 5998.61,2770 cw(c5998.61,2717.61) P6.2@6035.66,2754.66 ; 6013.1,2770 ccw(c6013.1,2811.9) P6.2@6042.73,2782.27 ; 6022.76,2770 cw(c6022.76,2741.76) P6.2@6042.73,2761.73 ; 6030.28,2813.65 ccw(c6094.65,2813.65) P6.2@6049.13,2768.13 ; 6030.27,2837.79 ccw(c6118.79,2837.79) P6.2@6056.2,2775.2 ; 6030.27,2861.94 ccw(c6142.94,2861.94) P6.2@6063.27,2782.27 ; 6030.27,2886.08 ccw(c6167.08,2886.08) P6.2@6070.34,2789.34 ; U4.16@6030.27,3065 6030.27,2794.72 P6.2@6053,2772
NetP8_11: P8.11 R23.1 | length 485.3
  Top Layer w8: R23.1@4614.31,1553.32 cw(c4614.31,1494.48) 4655.92,1536.08 ; R23.1@4614.31,1561.32 cw(c4614.31,1521.79) 4642.26,1549.74 ; R23.1@4615,1577 4698,1494 P8.11@4698,1395 ; R23.1@4634,1573 ccw(c4670.21,1573) 4644.61,1547.39 ; P8.11@4679.95,1413.05 ccw(c4636.37,1456.63) 4698,1456.63 ccw(c4759.63,1456.63) P8.11@4716.05,1413.05 ; P8.11@4685.61,1407.39 ccw(c4655.68,1437.32) 4698,1437.32 ccw(c4740.32,1437.32) P8.11@4710.39,1407.39
NetP8_17: P8.17 R24.1 | length 302.9
  Top Layer w20: P8.17@4384.19,1408.81 ccw(c4350.86,1442.14) 4398,1442.14 ccw(c4445.14,1442.14) P8.17@4411.81,1408.81 ; R24.1@4386.64,1565.32 cw(c4359.21,1537.89) 4398,1537.89 ; P8.17@4398,1395 R24.1@4398,1572 ; 4398,1546.03 cw(c4425.29,1546.03) R24.1@4405.99,1565.32
NetP8_19: P8.19 R25.1 | length 388.1
  Top Layer w20: R25.1@4267.64,1565.32 cw(c4194.34,1492.02) 4298,1492.02 ; R25.1@4276,1575 4298,1553 P8.19@4298,1395 ; R25.1@4281.78,1579.47 cw(c4242.62,1540.31) 4298,1540.31 ; P8.19@4284.19,1408.81 ccw(c4250.86,1442.14) 4298,1442.14 ccw(c4345.14,1442.14) P8.19@4311.81,1408.81
NetP20_2: P20.2 R4.1 | length 349.7
  Top Layer w15: P20.2@3220.42,3951.37 R4.1@3362.37,3951.37 ; P20.2@3245.95,3933.34 cw(c3289.47,3889.82) 3289.47,3951.37 cw(c3289.47,4012.92) P20.2@3245.95,3969.4 ; 3295.85,3951.37 ccw(c3295.85,4040.15) R4.1@3358.63,3977.37 ; 3332.06,3951.37 ccw(c3332.06,4003.94) R4.1@3369.23,3966.77
NetP20_3: P20.3 R5.1 | length 640.3
  Top Layer w10: P20.3@3220.42,3872.63 3349.37,3872.63 R5.1@3374,3848 ; P20.3@3240.64,3859.9 cw(c3271.36,3829.18) 3271.36,3872.63 cw(c3271.36,3916.08) P20.3@3240.64,3885.36 ; P20.3@3247.71,3852.83 cw(c3295.51,3805.04) 3295.51,3872.63 cw(c3295.51,3940.22) P20.3@3247.71,3892.43 ; 3261.25,3872.63 cw(c3261.25,3740.25) R5.1@3354.86,3833.86 ; 3285.4,3872.63 cw(c3285.4,3764.4) R5.1@3361.93,3840.93 ; 3309.54,3872.63 cw(c3309.54,3788.54) R5.1@3369,3848 ; 3333.68,3872.63 cw(c3333.68,3812.68) R5.1@3376.07,3855.07
NetR7_1: R7.1 R8.2 U5.19 | length 475.9
  Top Layer w8: v3@3823.76,3441.76 cw(c3815.93,3433.93) 3827,3433.93 ; v3@3823.76,3450.24 ccw(c3815.93,3458.07) 3827,3458.07 ; 3827,3429.1 cw(c3844.9,3429.1) v3@3832.24,3441.76 ; 3827,3462.9 ccw(c3844.9,3462.9) v3@3832.24,3450.24 ; R7.1@3839.33,3389.69 ccw(c3797.18,3391.18) 3827,3421 ; R7.1@3847.32,3389.41 ccw(c3822.3,3390.29) 3840.01,3407.99 ccw(c3857.71,3425.7) R7.1@3858.59,3400.68 ; R7.1@3858.31,3408.67 cw(c3856.82,3450.82) 3827,3421 ; R7.1@3859,3389 3827,3421 ; U5.19@3862.55,3584.45 3827,3548.9 3827,3421
  Bottom Layer w8: v3@3823.76,3441.76 cw(c3813.51,3431.51) 3828,3431.51 cw(c3842.49,3431.51) v3@3832.24,3441.76 ; v3(3828,3446) 3828,3415 R8.2@3858.36,3384.64
NetR10_1: R10.1 U4.53 | length 368.4
  Top Layer w8: R10.1@5787.77,4019.08 cw(c5772.58,4003.9) 5794.05,4003.9 ; U4.53@5794.06,3813.03 5794.06,4024.05 R10.1@5803,4033 ; 5794.06,3967.06 cw(c5867.63,3967.06) R10.1@5815.6,4019.08 ; 5794.05,3986.37 cw(c5848.32,3986.37) R10.1@5809.95,4024.74 ; 5794.06,4005.68 cw(c5829,4005.68) R10.1@5804.29,4030.39
NRST: C27.2 NU1.25 P8.15 R16.1 REST1.2 | length 4077.5
  Top Layer w10: NU1.25@5161.49,2934.47 5291.95,2804 5350,2804 5453,2907 5531,2907 5585,2853 5585,2705.23 5666.23,2624 v1(5733,2624) v1@5734,2624
  Bottom Layer w10: v1(5733,2624) 5759,2598 5759,2426 R16.1@5770,2415 ; R16.1@5759,2439.7 ccw(c5793.38,2439.7) R16.1@5769.07,2415.39 ; 5759,2463.84 ccw(c5817.52,2463.84) R16.1@5776.14,2422.46 ; 5759,2487.98 ccw(c5841.67,2487.98) R16.1@5783.21,2429.53
  Bottom Layer w20: P8.15@4498,1375.47 cw(c4498,1328.33) 4531.34,1361.66 cw(c4564.67,1395) P8.15@4517.53,1395 ; P8.15@4498,1395 4549,1344 4549,1251 4621,1179 5463,1179 5664.99,1380.99 REST1.2@5664.99,2192.55 REST1.2@5691.55,2192.55 ; REST1.2@5644.23,2171.79 cw(c5594.09,2121.65) 5664.99,2121.65 cw(c5735.9,2121.65) REST1.2@5685.76,2171.79
  Bottom Layer w30: REST1.2@5664.99,2216.92 ccw(c5664.99,2339.88) 5751.94,2252.94 ; REST1.2@5691.55,2192.55 5770,2271 R16.1@5770,2415 ; 5740.38,2241.38 ccw(c5697.07,2284.68) C27.2@5758.31,2284.68 ; C27.2@5760.86,2293.46 ccw(c5738.79,2315.53) 5770,2315.53